# Altium PCB Holtek_Discovery_BS6xfxxx_TEST1.PcbDoc
Units mil, origin at the board's own origin, x right, y up, seen from the top; angles counter-clockwise.
Board outline 2755.91 x 3545 mil, 2 copper layers (Top Layer, Bottom Layer); 76 components, 96 nets, 307 pads, 108 vias.
Unrouted connection lines stored in the file: 4.
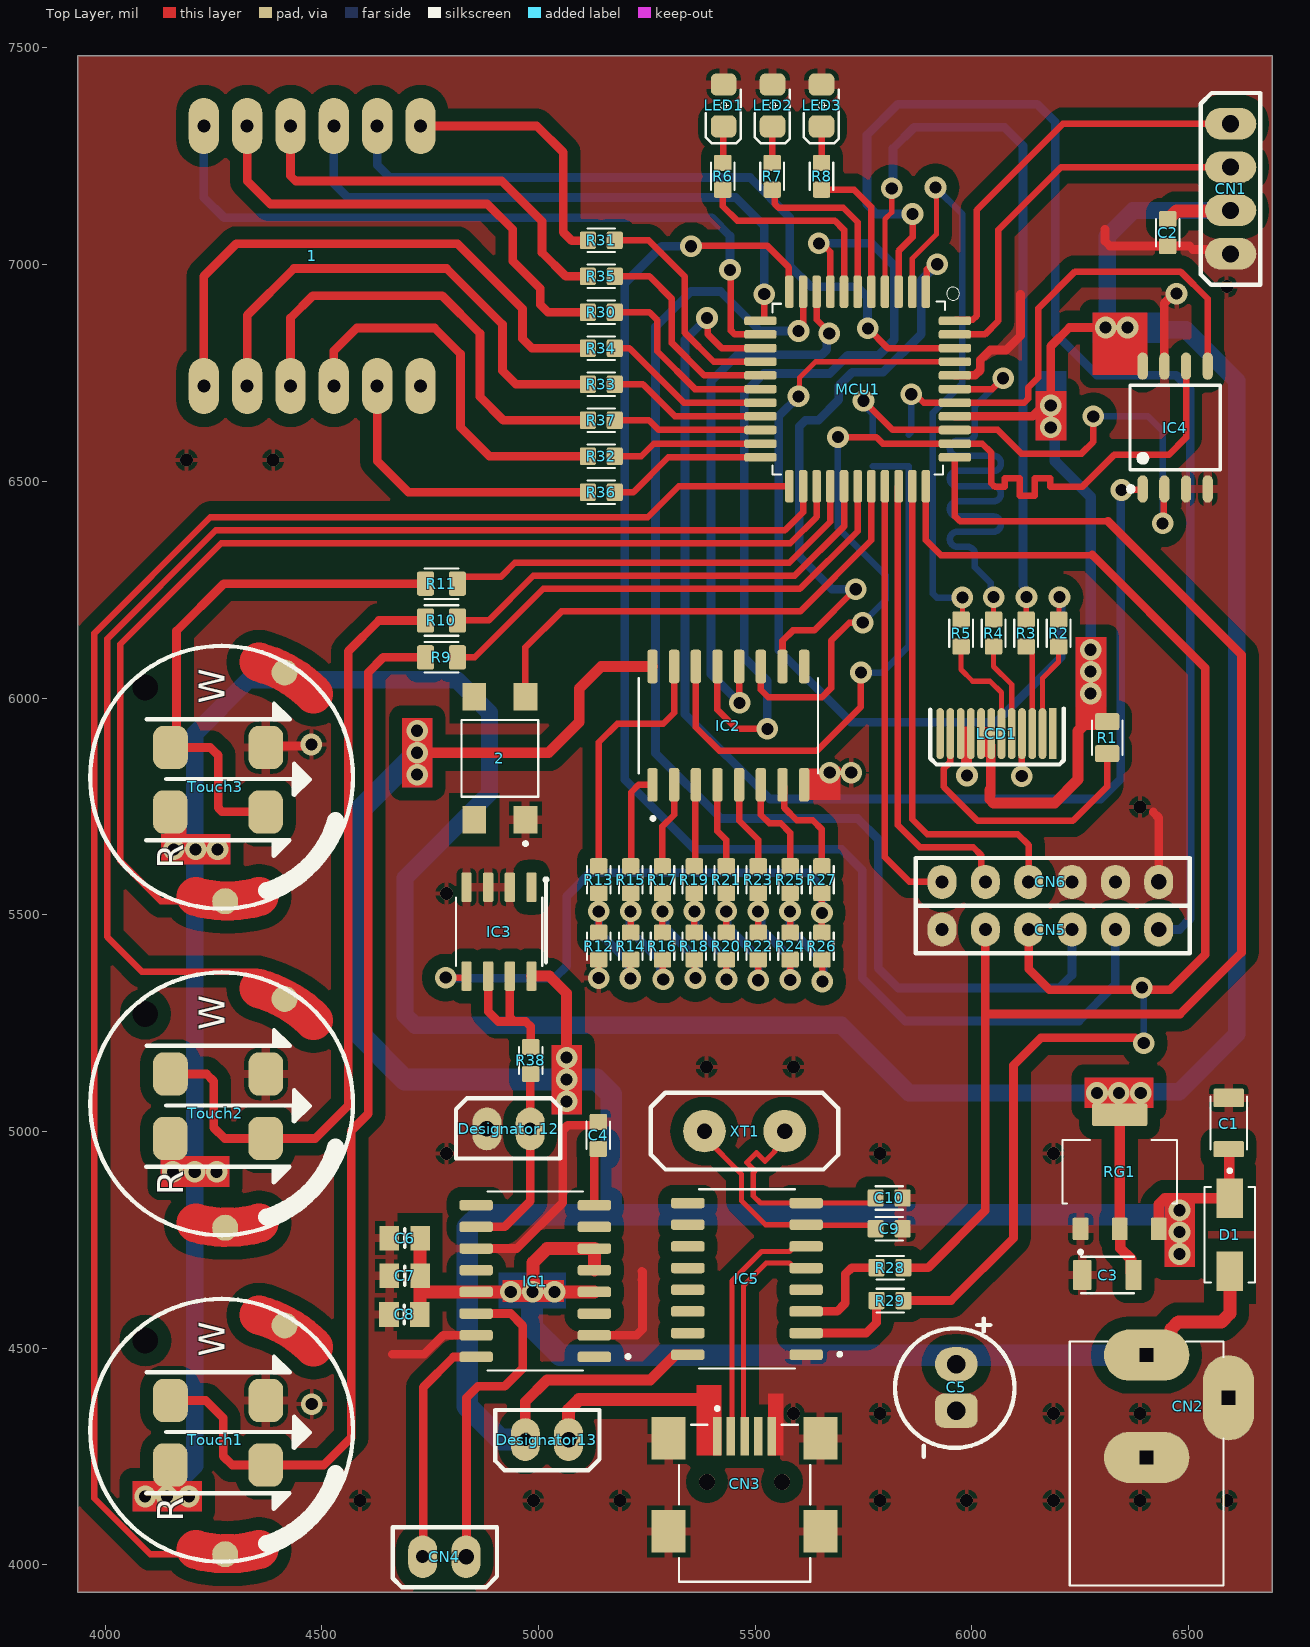
[diagram p0: Top Layer view]
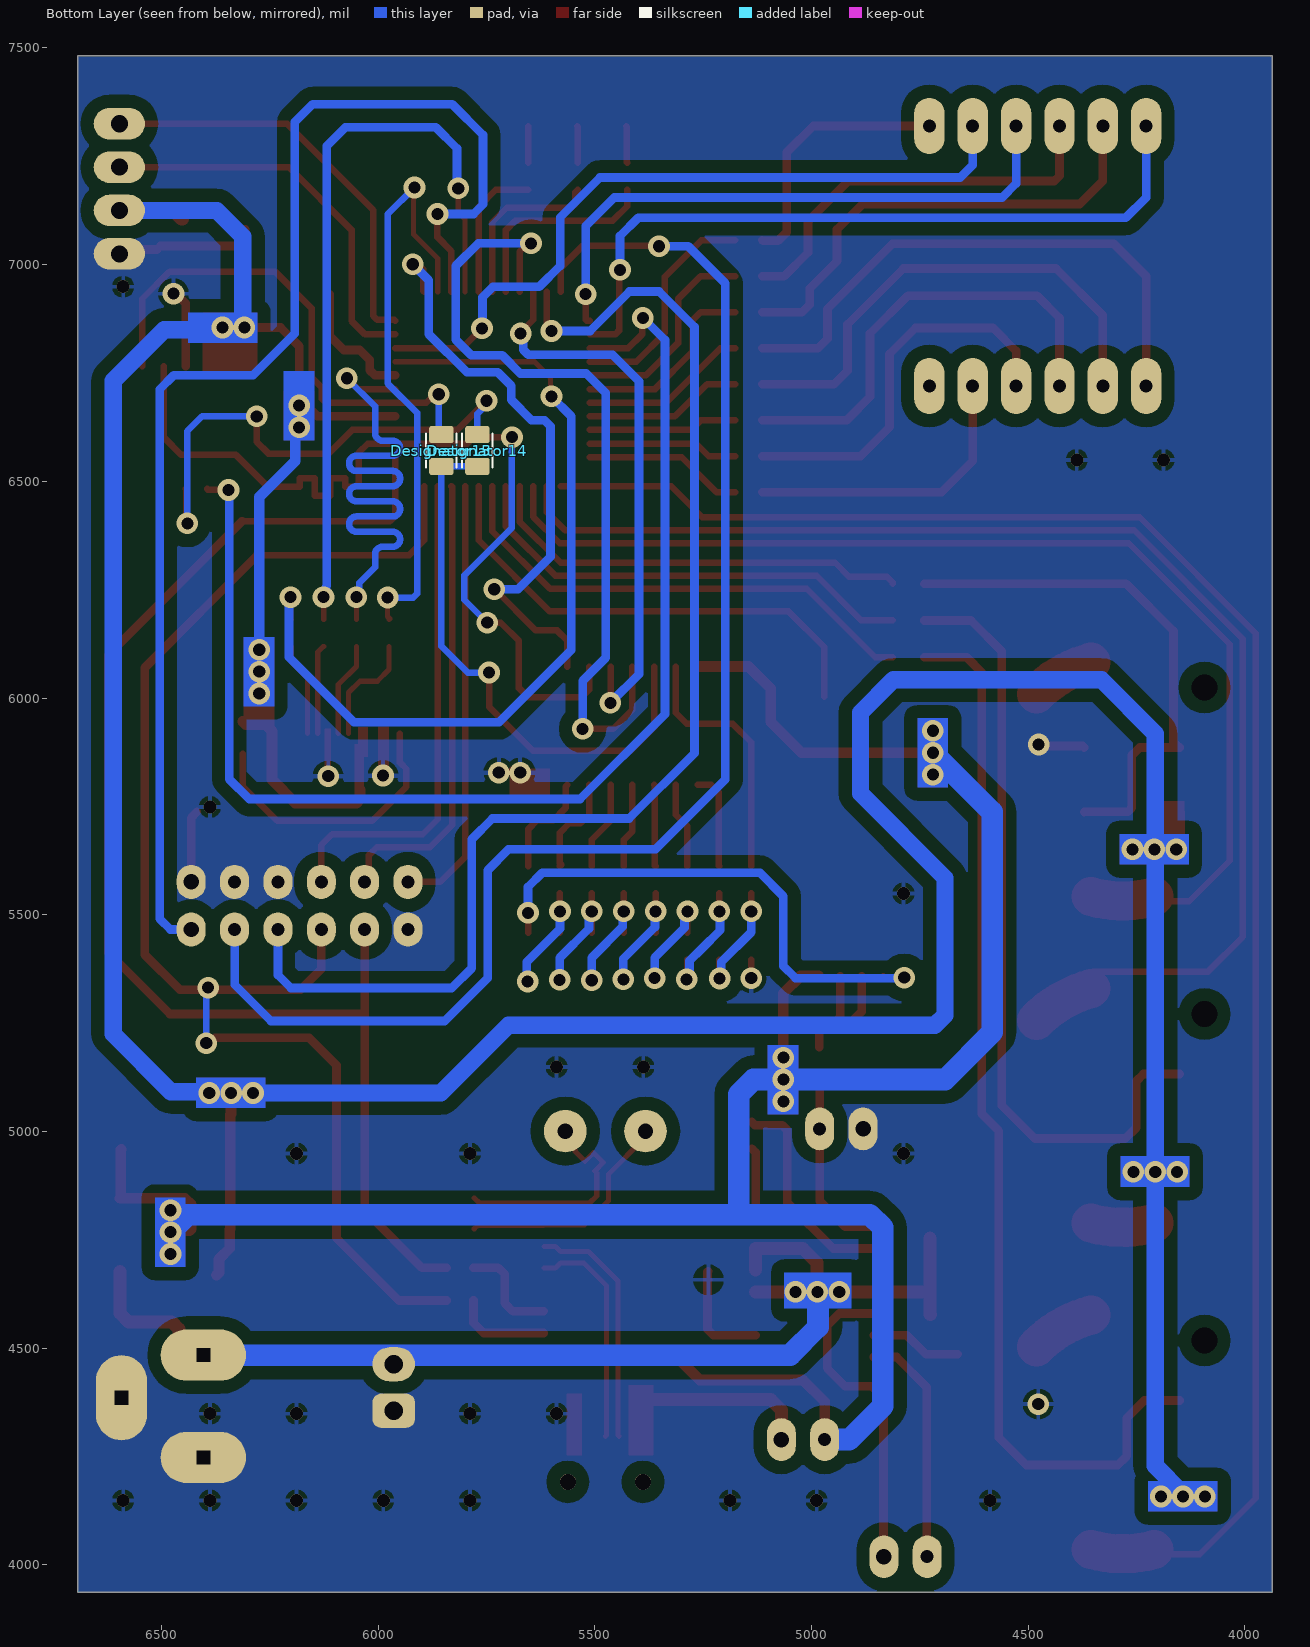
[diagram p1: Bottom Layer view, seen from below]
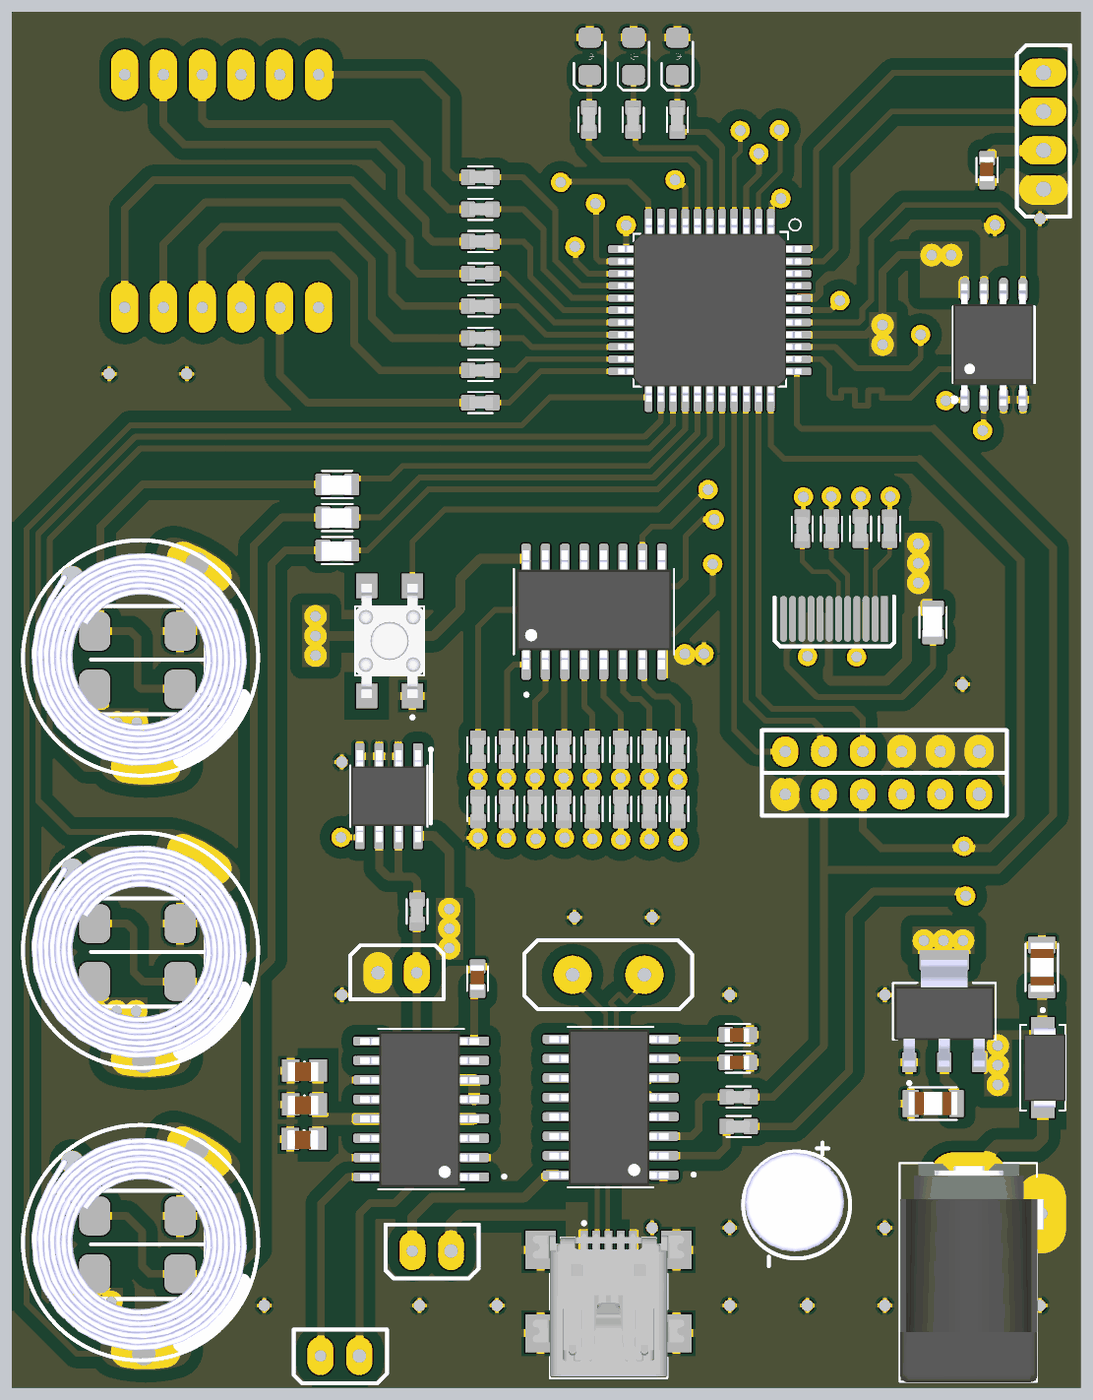
[diagram p2: 3D render of the assembled board from above, using the file's embedded part models]

## Layer stack, top to bottom
Top Solder: solder mask 0.4, Solder Resist, Dk 3.5
Top Layer: signal copper 1.4
Dielectric 1: dielectric 12.6, FR-4, Dk 4.8
Bottom Layer: signal copper 1.4
Bottom Solder: solder mask 0.4, Solder Resist, Dk 3.5

## Board outline
3937,3937 3937,7482 6692.91,7482 6692.91,3937

## Design rules (kind name [scope] priority, off if disabled: settings)
Clearance POLY [InPolygon] p1: gap=30 ignorepadtopadclearanceinfootprint=FALSE
Clearance COMPONENT [InComponent('MCU1')+InComponent('LCD1')+InComponent('CN3')+InComponent('Touch1')  +InComponent('Touch2')+InComponent('Touch3')] p2: gap=0 ignorepadtopadclearanceinfootprint=FALSE
Clearance SPI-LCD [InNetClass('LCD')+InNetClass('SPI')] p3: gap=10 ignorepadtopadclearanceinfootprint=FALSE
Clearance POWER+ [InNetClass('POWER')] p4: gap=15 ignorepadtopadclearanceinfootprint=FALSE
Clearance NORMAL [All] p5: gap=15 ignorepadtopadclearanceinfootprint=FALSE
ComponentClearance a [InComponent('CN5')+InComponent('CN7')] p1: gap=0 collisioncheckmode=3 verticalgap=0 showdistances=FALSE
ComponentClearance [All] p2: gap=10 collisioncheckmode=3 verticalgap=10 showdistances=FALSE
DiffPairsRouting [InDifferentialPair('USB')] p1: maxlimit=50 minlimit=10 mostfreqgap=15 toplayer_minwidth=10 toplayer_maxwidth=50 toplayer_prefwidth=15 bottomlayer_minwidth=10 bottomlayer_maxwidth=50 bottomlayer_prefwidth=15 maxuncoupledlength=500
MatchedLengths [InNetClass('LCD')+InNetClass('SPI')+InNetClass('XT')] p1: tolerance=78.74 checknetsindiffpair=FALSE checkdiffpairvsdiffpair=TRUE checkxsignals=TRUE checkothers=TRUE
PlaneConnect [All] p1: planeconnectstyle=Direct reliefexpansion=20 reliefentries=4 reliefconductorwidth=10 reliefairgap=10
PolygonConnect all [All] p1: thpad.connectstyle=Direct thpad.reliefconductorwidth=30 thpad.reliefentries=4 thpad.polygonreliefangle="45 Angle" thpad.airgapwidth=30 smdpad.connectstyle=Relief smdpad.reliefconductorwidth=20 smdpad.reliefentries=4 smdpad.polygonreliefangle="90 Angle" smdpad.airgapwidth=10 via.connectstyle=Relief via.reliefconductorwidth=10 via.reliefentries=4 via.polygonreliefangle="90 Angle" via.airgapwidth=10
RoutingVias [All] p1: holewidth=28 width=50 viastyle="Through Hole" minholewidth=28 minwidth=50 maxholewidth=28 maxwidth=50
SolderMaskExpansion [All] p1: expansion=4 istentingtop=FALSE
Width LCD-SPI [InNetClass('LCD')+InNetClass('SPI')] p1: maxlimit=15 minlimit=10 preferedwidth=15 minimp=50.000000 maximp=50.000000 favimp=50.000000
Width POWER [InNetClass('POWER')] p2: maxlimit=50 minlimit=20 preferedwidth=30 bottomlayer_minwidth=25 minimp=50.000000 maximp=50.000000 favimp=50.000000
Width ELSE [All] p3: maxlimit=100 minlimit=10 preferedwidth=20 minimp=50.000000 maximp=50.000000 favimp=50.000000
27 further rules are at their usual default settings.

## Classes and differential pairs
net class XT: NetC9_2 NetC10_2
net class SPI: MISO MOSI SPI_CLK
net class POWER: +3.3 +5 NetC2_2
net class LCD: LCD_SCL LCD_SDA NetLCD1_2 NetLCD1_3 NetLCD1_5 NetLCD1_6
net class ADC: AN4 AN5 AN6
component class U_Connectors: C1 C2 CN2 CN3 CN4 CN5 D1 LCD1 R1 R2 R3 R4 R5 RG1
net class Analog: +5_JAC DAC_OUT GND IN_L NetC4_1 NetIC1_9 NetIC2_1 NetIC2_2 NetIC2_3 NetIC2_4 NetIC2_5 NetIC2_6 NetIC2_7 NetIC2_15 NetIC3_1 NetIC3_5 NetR12_1 NetR14_1 NetR16_1 NetR18_1 NetR20_1 NetR22_1 NetR24_1 OUT_L+ OUT_L- OUT_R+ OUT_R-
component class U_USB_to_Serial_Adapter: C9 C10 IC5 R28 R29 XT1
component class U_Spi_Flash: IC4
component class U_Microcontroller: C3 CN1 MCU1
component class U_Led-7Segment-Switch: 1 2 LED1 LED2 LED3 R6 R7 R8 R30 R31 R32 R33 R34 R35 R36 R37
component class U_DAC: IC2 IC3 R12 R13 R14 R15 R16 R17 R18 R19 R20 R21 R22 R23 R24 R25 R26 R27
component class U_Capacitive_touch: R9 R10 R11 Touch1 Touch2 Touch3
component class U_Amplifier-Speaker: C4 C5 C6 C7 C8 IC1
differential pair NewDifferentialPair1: +NetC9_2 -NetC10_2
differential pair USB: +USB_P -USB_N

## Components (designator, comment, footprint, x,y, rotation, side; value= is the part's Value field where it differs from the comment)
1 "7SEG-3DIG" 7seg-3d 4228,6720 r0 top
2 "micro_sw" micro_switch_smd 4911,5861 r90 top
C1 "cap" CAP-1206 6587,5019 r270 top
C2 "cap" CAP-0603 6451,7078 r90 top
C3 "100nF" CAP-1206 6313.27,4663.51 r0 top
C4 "100nF" CAP-0603 5137.33,4995.16 r90 top
C5 "470uF" cap/330u/16v 5964,4355.93 r90 top
C6 "1uF" CAP-0805 4655.01,4754.85 r0 top
C7 "1uF" CAP-0805 4655,4668 r0 top
C8 "1uF" CAP-0805 4654.15,4578.85 r0 top
C9 "22pF" CAP-0603 5805,4775 r180 top
C10 "22pF" CAP-0603 5805,4846 r180 top
CN1 "ICP" CONECTOR/XH/4PIN 6597,7025 r90 top
CN2 "DC005" dc005 6402.84,4386.35 r90 top
CN3 "mini_usb" usb_mini_smd 5475.5,4191.69 r0 top
CN4 "\" CONECTOR/XH/2PIN 4831.69,4020.75 r180 top
CN5 "TIM-INT0" pin_header_6pin 6430.99,5466.01 r180 top
CN6 "TIM-INT0" pin_header_6pin 6430.99,5576.01 r180 top (schematic designator CN5)
D1 "M7" DIOD/1N4007/SMD 6595,4846.75 r270 top
Designator12 "Comment" CONECTOR/XH/2PIN 4882.31,5004.25 r0 top
Designator13 "Comment" CONECTOR/XH/2PIN 5068.24,4291.07 r180 top
Designator14 "Comment" RES/0805 5807.75,6612.47 r270 bottom
Designator15 "Comment" RES/0805 5890.75,6612.47 r270 bottom
IC1 "PAM8403" SOP16 4992.62,4655 r180 top
IC2 "74hc595" SOP16 5438,5936.38 r90 top
IC3 "LM358" SOP-8 4904,5446 r270 top
IC4 "W25QXX" SOIC-8PIN-280MIL 6469,6624 r90 top
IC5 "CH340G" SOP16 5481,4660 r180 top
LCD1 "LCD_TFT_NOKIA1616" lcd1616-flat 6186.45,5918.86 r90 top
LED1 "red" LED/0805 5427.01,7318.99 r90 top
LED2 "red" LED/0805 5540.02,7318.99 r90 top
LED3 "red" LED/0805 5653.02,7318.99 r90 top
MCU1 "bs66f360" bs66f360 5541.41,6908.02 r270 top locked
R1 "10R" RES/0805 6275.25,5950.09 r270 top
R2 "1K" RES/0603 6200,6154 r90 top
R3 "1K" RES/0603 6125,6154 r90 top
R4 "1K" RES/0603 6050,6154 r90 top
R5 "1K" RES/0603 5975,6154 r90 top
R6 "330R" RES/0603 5425.01,7200 r270 top
R7 "330R" RES/0603 5539.01,7200 r270 top
R8 "330R" RES/0603 5653.01,7200 r270 top
R9 "100R" RES/0805 4734.91,6057.25 r0 top
R10 "100R" RES/0805 4734.91,6142.25 r0 top
R11 "100R" RES/0805 4734.91,6227.25 r0 top
R12 "10K-1%" RES/0603 5139,5424 r270 top
R13 "10K-1%" RES/0603 5139,5584.8 r90 top
R14 "10K-1%" RES/0603 5212.57,5424 r270 top
R15 "10K-1%" RES/0603 5212.57,5584.8 r90 top
R16 "10K-1%" RES/0603 5286.14,5424 r270 top
R17 "10K-1%" RES/0603 5286.14,5584.8 r90 top
R18 "10K-1%" RES/0603 5359.71,5424 r270 top
R19 "10K-1%" RES/0603 5359.71,5584.8 r90 top
R20 "10K-1%" RES/0603 5433.29,5424 r270 top
R21 "10K-1%" RES/0603 5433.29,5584.8 r90 top
R22 "10K-1%" RES/0603 5506.86,5424 r270 top
R23 "10K-1%" RES/0603 5506.86,5584.8 r90 top
R24 "10K-1%" RES/0603 5580.43,5424 r270 top
R25 "10K-1%" RES/0603 5580.43,5584.8 r90 top
R26 "10K-1%" RES/0603 5654,5424 r270 top
R27 "10K-1%" RES/0603 5654,5584.8 r90 top
R28 "470R" RES/0603 5815,4686 r0 top
R29 "470R" RES/0603 5815,4610 r0 top
R30 "100R" RES/0603 5141,6890 r180 top
R31 "100R" RES/0603 5141,7056 r180 top
R32 "100R" RES/0603 5141,6558 r180 top
R33 "100R" RES/0603 5141,6724 r180 top
R34 "100R" RES/0603 5141,6807 r180 top
R35 "100R" RES/0603 5141,6973 r180 top
R36 "100R" RES/0603 5141,6475 r180 top
R37 "100R" RES/0603 5141,6641 r180 top
R38 "10K-1%" RES/0603 4982,5160 r270 top (schematic designator R12)
RG1 "AMS1117" AMS1117 6341,4897 r90 top
Touch1 "touch-fanar-2led" fanar-touch-2led#1 4249.28,4311.23 r90 top
Touch2 "touch-fanar-2led" fanar-touch-2led#2 4249.28,5064.46 r90 top
Touch3 "touch-fanar-2led" fanar-touch-2led#3 4249.28,5817.68 r90 top
XT1 "12MH" XTL16MH 5568,5001 r180 top

## Footprints (in the part's own frame and the unit in brackets; to place one, negate y for a bottom-side part, rotate by r counter-clockwise, add the part's x,y. Pads: shape width x height; smd on the part's side, far side on the other; paste and mask are expansions set on the pad)
7seg-3d [mil]
  oval 70x130 hole 30: A(100,600) B(500,600) C(300,0) D(100,0) DIS(500,0) DOT(200,0) E(-0.01,-0.01) F(200,600) G(400,0) M1(0,600) M2(300,600) M3(400,600)
AMS1117 [mm]
  rrect15% 1.31x0.93 smd: 1(-3.091,2.29) 2(-3.091,0) 3(-3.091,-2.29)
  rrect15% 1.31x3.24 smd: 4(3.599,0)
  silkscreen extent -4.55,-3.36 2.11,3.36, body extent -3.37,-3.25 3.63,3.25, height 1.73
bs66f360 [mm]
  rrect50% 1.9x0.5 smd: 1(-0.747,8.953) 2(-0.747,8.153) 3(-0.747,7.353) 4(-0.747,6.553) 5(-0.747,5.753) 6(-0.747,4.953) 7(-0.747,4.153) 8(-0.747,3.353) 9(-0.747,2.553) 10(-0.747,1.753) 11(-0.747,0.953) 23(10.653,0.953) 24(10.653,1.753) 25(10.653,2.553) 26(10.653,3.353) 27(10.653,4.153) 28(10.653,4.953) 29(10.653,5.753) 30(10.653,6.553) 31(10.653,7.353) 32(10.653,8.153) 33(10.653,8.953)
  rrect50% 0.5x1.9 smd: 12(0.953,-0.747) 13(1.753,-0.747) 14(2.553,-0.747) 15(3.353,-0.747) 16(4.153,-0.747) 17(4.953,-0.747) 18(5.753,-0.747) 19(6.553,-0.747) 20(7.353,-0.747) 21(8.153,-0.747) 22(8.953,-0.747) 34(8.953,10.653) 35(8.153,10.653) 36(7.353,10.653) 37(6.553,10.653) 38(5.753,10.653) 39(4.953,10.653) 40(4.153,10.653) 41(3.353,10.653) 42(2.553,10.653) 43(1.753,10.653) 44(0.953,10.653)
  silkscreen extent -1.02,-0.05 9.95,10.92, body extent -1.05,-1.04 10.95,10.96, height 1.6
CAP-0603 [mm]
  rrect20% 0.94x1.02 smd: 1(-0.893,-0.017) 2(0.687,-0.017)
  silkscreen extent -0.9,-0.71 0.7,0.67, body extent -0.84,-0.44 0.76,0.46, height 0.77
CAP-0805 [mm]
  rect 1.15x1.45 smd: 1(0.025,-0.022) 2(1.825,-0.022)
  silkscreen extent 0.93,-0.57 0.93,0.53, body extent -0.17,-0.71 1.84,0.54, height 0.94
CAP-1206 [mm]
  rrect14% 1.09x1.77 smd: 1(-1.488,0.139)
  rrect14% 0.94x1.77 smd: 2(1.517,0.139)
  silkscreen extent -1.57,-0.93 1.53,1.2, body extent -1.63,-0.6 1.57,0.9, height 1.6
cap/330u/16v [mm]
  oval 2x2.5 hole 1.1: +(2.72,0)
  rrect50% 2x2.5 hole 1.1: -(0,0)
  silkscreen extent -2.7,-3.41 5.4,3.59, body extent -1.74,-3.02 4.76,3.48, height 11
CONECTOR/XH/2PIN [mm]
  oval 1.7x2.5 hole 0.9: 1(-0.033,0.044)
  oval 1.7x2.5 hole 0.762: 2(2.507,0.044)
  silkscreen extent -1.84,-1.69 4.26,1.84
CONECTOR/XH/4PIN [mm]
  oval 1.85x3 hole 1: 1(0,0) 2(2.54,0) 3(5.08,0) 4(7.62,0)
  silkscreen extent -1.81,-1.73 9.43,1.75
dc005 [mm]
  oval 5x3 hole 0.8 square: 2(-0.014,-4.804)
  oval 3x5 hole 0.8 square: 3(-3.514,-0.004) 4(2.486,-0.004)
  silkscreen extent -11.01,-4.5 3.29,4.5, body extent -11.06,-4.94 3.24,4.46, height 11
DIOD/1N4007/SMD [mm]
  rect 2.33x1.56 smd: A(4.299,0) K(0.019,0)
  silkscreen extent -1.7,-1.48 4.96,1.48, body extent -0.44,-1.24 4.76,1.49, height 2.6
fanar-touch-2led#1 [mil]
  oct 0x0 hole 59.06: 5(206.71,156.04)
  rrect60% 100x80 smd: AR(-80.55,98.79) AW(68.32,98.28) KR(-80.55,-121.21) KW(68.32,-121.72)
  round 60 smd: T(-286.39,-27.99) T(241.59,-165.09)
  Top Layer lines w90: -275.86,39.27 ccw(c-5.4,-33.2) -275.75,-106.1 ; 265.05,-105.67 cw(c-5.4,-33.2) 191.96,-231.81
  silkscreen extent -304,-323 303,283, body extent -384,-398 381,369, height 634
fanar-touch-2led#2 [mil]
  oct 0x0 hole 59.06: 5(206.71,156.04)
  rrect60% 100x80 smd: AR(-80.55,98.79) AW(68.32,98.28) KR(-80.55,-121.21) KW(68.32,-121.72)
  round 60 smd: T(-286.39,-27.99)
  round 60 smd paste-60: T(241.59,-165.09)
  Top Layer lines w90: -275.86,39.27 ccw(c-5.4,-33.2) -275.75,-106.1 ; 265.05,-105.67 cw(c-5.4,-33.2) 241.59,-165.09 cw(c-5.4,-33.2) 191.96,-231.81
  silkscreen extent -304,-323 303,283, body extent -384,-398 381,369, height 634
fanar-touch-2led#3 [mil]
  oct 0x0 hole 59.06: 5(206.71,156.04)
  rrect60% 100x80 smd: AR(-80.55,98.79) AW(68.32,98.28) KR(-80.55,-121.21) KW(68.32,-121.72)
  round 60 smd paste-60: T(-286.39,-27.99)
  round 60 smd: T(241.59,-165.09)
  Top Layer lines w90: -275.86,39.27 ccw(c-5.4,-33.2) -275.75,-106.1 ; 265.05,-105.67 cw(c-5.4,-33.2) 191.96,-231.81
  silkscreen extent -304,-323 303,283, body extent -384,-398 381,369, height 634
lcd1616-flat [mm]
  rect 3x0.45 smd paste+0 mask+0: 1(-0.022,-0.001)
  oval 3x0.45 smd paste+0 mask+0: 2(-0.022,0.599) 3(-0.022,1.199) 4(-0.022,1.799) 5(-0.022,2.399) 6(-0.022,2.999) 7(-0.022,3.599) 8(-0.022,4.199) 9(-0.022,4.799) 10(-0.022,5.399) 11(-0.022,5.999) 12(-0.022,6.599)
  silkscreen extent -1.83,-0.65 1.45,7.18
LED/0805 [mm]
  rrect50% 1.3x1.5 smd: A(2.45,0) K(0,0)
  silkscreen extent -0.99,-1.02 2.16,1.03
micro_switch_smd [mm]
  rect 1.6x1.4 smd: 1(-3.6,-1.5) 2(3.6,-1.5) 3(-3.6,1.5) 4(3.6,1.5)
  silkscreen extent -5.1,-2.25 2.25,2.25, body extent -3.75,-2.25 3.75,2.25, height 3.7
pin_header_6pin [mm]
  oval 1.7x2 hole 0.9: 1(0,0)
  oval 1.7x2 hole 0.762: 2(2.54,0) 3(5.08,0) 4(7.62,0) 5(10.16,0) 6(12.7,0)
  silkscreen extent -1.81,-1.4 14.23,1.4
RES/0603 [mm]
  rrect20% 0.94x1.02 smd: 1(-0.889,0) 2(0.691,0)
  silkscreen extent -0.9,-0.69 0.7,0.69, body extent -0.93,-0.41 0.67,0.39, height 0.43
RES/0805 [mm]
  rrect25% 1x1.42 smd: 1(0.113,0.933) 2(1.983,0.933)
  silkscreen extent 0.05,0.04 2.05,1.82, body extent 0,0.28 2,1.53, height 0.6
SOIC-8PIN-280MIL [mm]
  oval 1.6x0.6 smd: 1(-3.596,1.905) 2(-3.596,0.635) 3(-3.596,-0.635) 4(-3.596,-1.905) 5(3.604,-1.905) 6(3.604,-0.635) 7(3.604,0.635) 8(3.604,1.905)
  silkscreen extent -3.82,-2.65 2.48,2.82, body extent -3.99,-2.59 3.99,2.65, height 2.16
SOP16 [mm]
  rrect50% 1.97x0.61 smd: 1(-3.464,4.445) 2(-3.464,3.175) 3(-3.464,1.905) 4(-3.464,0.635) 5(-3.464,-0.635) 6(-3.464,-1.906) 7(-3.464,-3.175) 8(-3.464,-4.445) 9(3.466,-4.445) 10(3.466,-3.175) 11(3.466,-1.905) 12(3.466,-0.635) 13(3.466,0.635) 14(3.466,1.905) 15(3.466,3.175) 16(3.466,4.445)
  silkscreen extent -5.53,-5.25 2.8,5.25, body extent -3.79,-5.09 4.01,5.11, height 2
SOP-8 [mm]
  rrect25% 1.71x0.61 smd: 1(-2.986,2.032) 2(-2.986,0.762) 3(-2.986,-0.508) 4(-2.986,-1.778) 5(2.224,-1.778) 6(2.224,-0.508) 7(2.224,0.762) 8(2.224,2.032)
  silkscreen extent -3.53,-2.4 1.62,2.98, body extent -3.38,-2.32 2.62,2.58, height 1.75
usb_mini_smd [mm]
  rect 0.5x2.25 smd: 1(-1.6,2.675) 2(-0.8,2.675) 3(0,2.675) 4(0.8,2.675) 5(1.6,2.675)
  rect 2x2.5 smd: S1(-4.45,2.55) S2(4.45,2.55) S3(-4.45,-2.9) S4(4.45,-2.9)
  round 0.95 hole 0.95 unplated: ""(-2.2,0) ""(2.2,0)
  silkscreen extent -3.85,-5.85 3.85,4.4, body extent -4.95,-5.72 4.95,3.61, height 3.95
XTL16MH [mm]
  round 2.5 hole 0.9: 1(0,0) 2(4.7,0)
  silkscreen extent -3.13,-2.25 7.85,2.25

## Part data
C1 C2 C3 C4 C6 C7 C8 C9 C10: library part cap_smd
C5: library part cap-electrolit
CN1: library part CONECTOR/XH/4PIN
CN2: library part JAC_ADAPTOR
CN3: library part usb_mini
CN4: library part CONECTOR/XH/2PIN
CN5 CN6: library part PIN_HEADER6
D1: library part DIOD/RECTIFIERS
IC1: "STEREO AUDIO AMPLIFIER"
IC4: library part w25qxx
IC5: library part ch340g
LCD1: library part lcd_nokia1616
LED1 LED2 LED3: library part LED-1COLER
R1 R2 R3 R4 R5 R6 R7 R8 R9 R10 R11 R12 R13 R14 R15 R16 R17 R18 R19 R20 R21 R22 R23 R24 R25 R26 R27 R28 R29 R30 R31 R32 R33 R34 R35 R36 R37 R38: library part RES/SMD
XT1: library part XTL16

## Via types
v1: diameter 50, hole 28, Top Layer to Bottom Layer, 86 vias
v2: diameter 30, hole 30, Top Layer to Bottom Layer, 22 vias

## Nets (pads, with @x,y where several pads share a name; then routed paths per layer and width w, separated by ;. In a path a pad name is that pad's centre, name@x,y a point inside that pad or via, vN(x,y) a via of type N, cw(c..) or ccw(c..) an arc to the next point about the centre after c; other vN are vias at no path point)
7SEG1_A: MCU1.17 R30.1 | length 451.5
  Top Layer w15: R30.1 5256,6890 5274,6872 5274,6800 5360.98,6713.02 MCU1.17
7SEG1_B: MCU1.15 R31.1 | length 527.9
  Top Layer w15: R31.1 5254,7056 5338,6972 5338,6842.43 5404.42,6776.01 MCU1.15
7SEG1_C: MCU1.21 R32.1 | length 348
  Top Layer w15: R32.1 5237,6558 5266.03,6587.03 MCU1.21
7SEG1_D: MCU1.19 R33.1 | length 366.6
  Top Layer w15: R33.1 5241,6724 5314.98,6650.02 MCU1.19
7SEG1_DOT: MCU1.20 R37.1 | length 345.3
  Top Layer w15: R37.1 5255,6641 5277.47,6618.53 MCU1.20
7SEG1_E: MCU1.18 R34.1 | length 388
  Top Layer w15: R34.1 5210,6807 5335.48,6681.52 MCU1.18
7SEG1_F: MCU1.16 R35.1 | length 490.4
  Top Layer w15: R35.1 5256,6973 5308,6921 5308,6819 5382.49,6744.51 MCU1.16
7SEG1_G: MCU1.22 R36.1 | length 369.4
  Top Layer w15: R36.1 5219,6475 5299.54,6555.54 MCU1.22
7SEG1_M1: 1.M1 MCU1.13 | length 1706.5
  Top Layer w15: v1(5442,6988) 5444,6986 5444,6847.79 5452.79,6839 MCU1.13
  Bottom Layer w20: 1.M1 4228,7155 4275,7108 5400,7108 5442,7066 v1(5442,6988)
7SEG1_M2: 1.M2 MCU1.12 | length 1392.7
  Top Layer w15: MCU1.12 5518.66,6870.5 5521,6872.84 v1(5521,6932)
  Bottom Layer w20: 1.M2 4528,7187 4560,7155 5455,7155 5521,7089 v1(5521,6932)
7SEG1_M3: 1.M3 MCU1.42 | length 1705
  Top Layer w15: v1(5760,6853) 5805.5,6807.5 MCU1.42
  Bottom Layer w20: 1.M3 4628,7230 4657,7201 5488,7201 5580,7109 5580,6997 5628,6949 5735,6949 5759,6925 5759,6854 v1(5760,6853)
+3.3: C2.2 C3.2 CN1.2 IC4.8 LCD1.7 LCD1.8 MCU1.37 R1.1 RG1.2 RG1.4 Touch1.AR Touch2.AR Touch3.AR | length 10168.7
  Top Layer w20: MCU1.37 6140.02,6650.02 v1@6182,6692 ; v1(6182,6675) v1@6182,6692 ; v1(6308.5,6855) 6225,6855 6182,6812 v1@6182,6692
  Top Layer w25: Touch3.AR 4150.25,5736.88 4150.25,5660.25 4159.49,5651 v1(4209,5651) ; 6041,5788 6041,5766.64 6049.64,5758 6191,5758 6245,5812 6245,5923.79 6259.64,5938.44 6304.81,5938.44 R1.1 6303.73,5945.62 6262,5987.35 v1@6262,6026 ; v1(6339,5089) 6339,5040.69 RG1.4 RG1.2 6342.11,4774.2 6342.11,4730.89 6367,4706 6367,4675 C3.2
  Top Layer w30: C2.2 6453.24,7105.05 6472.2,7124 6596,7124 CN1.2
  Bottom Layer w25: 6191,6649 6191,6547 6274,6464 v1(6274,6111.5) v1(6274,6061)
  Bottom Layer w40: v1(4143,4158) 4143,4164.76 4207,4228.76 v1(4207,4907) 4207,5918 4331,6042 4811,6042 4887,5966 4887,5780 4692,5585 4692,5268.43 4715.43,5245 5699,5245 5855,5089 v1(6288.5,5089) v1(6339,5089) 6342,5092 6478,5092 6611,5225 6611,6732 6493,6850 6317,6850 6312,6855 6312,7065 6372,7125 CN1.2
  other v1: 4092.5,4158 4193.5,4158 4156.5,4907 4257.5,4907 6389.5,5089 4158.5,5651 4259.5,5651 6274,6010.5 6182,6624.5 6359,6855
+5: C1.2 D1.K Designator13.2 IC2.16 IC3.8 IC5.16 RG1.3 | length 5738.7
  Top Layer w25: v1(4720,5874) 5023,5874 5094,5945 5094,6021.83 5145,6072.83 IC2.16 ; Designator13.2 4969.55,4376.55 5020,4427 5258,4427 5316,4485 IC5.16 ; IC3.8 5025.56,5358.44 5065,5319 v1(5065,5120) ; v1(6479,4768) 6475.35,4771.65 6434.81,4771.65 RG1.3 6431.16,4831.36 6445.8,4846 D1.K 6593.74,4847.26 6593.74,4958.01 C1.2
  Bottom Layer w50: v1(4720,5874) 4583,5737 4583,5229 4692,5120 5134,5120 5168,5086 5168,4808 ; Designator13.2 4912.68,4289.32 4836,4366 4836,4778.71 4865.29,4808 6439,4808 v1(6479,4768)
  other v1: 6479,4717.5 6479,4818.5 5065,5069.5 5065,5170.5 4720,5823.5 4720,5924.5
+5_JAC: C5.+ C6.2 C7.2 C8.2 CN2.4 D1.A IC1.4 IC1.5 IC1.6 IC1.13 | length 2719.7
  Top Layer w30: C8.2 4726.43,4578.43 4726.43,4636 ; C6.2 4726.43,4753.57 4726.43,4636 ; IC1.4 4991.65,4630 v1@4987.83,4633.83 ; IC1.5 IC1.6 5020.02,4730.02 4987.83,4697.83 v1@4987.83,4633.83 ; CN2.4 6418.53,4484.22 6459.23,4524.92 6459.23,4543.92 6476.31,4561 6576,4561 6595,4580 D1.A ; 4726.43,4636 4732.43,4630 IC1.13 4984,4630 v1@4987.83,4633.83
  Bottom Layer w50: v1@4984,4630 4984,4621 4985,4620 4985,4549 5049.78,4484.22 CN2.4
  other v1: 4936,4630 4986.5,4630 5037,4630
+5usb: CN3.1 Designator13.1 | length 441.2
  Top Layer w30: Designator13.1 5069.55,4357.55 5093.77,4381.77 5379.5,4381.77 5393.25,4368.02 5393.25,4334.5
AN4: CN6.4 MCU1.32 | length 1146.3
  Top Layer w15: MCU1.32 5862.39,5720.61 5897,5686 6106,5686 6131,5661 CN6.4
AN5: CN6.5 MCU1.31 | length 1068.8
  Top Layer w15: MCU1.31 5829.4,6487.11 5829.4,5706.6 5880,5656 6003,5656 6021.12,5637.88 6021.12,5585.89 CN6.5
AN6: CN6.6 MCU1.30 | length 1011
  Top Layer w15: MCU1.30 5799.4,5632.6 5855.99,5576.01 CN6.6
CH_RXD: IC5.3 R28.1 | length 243.9
  Top Layer w20: IC5.3 5689,4585 5708,4604 5708,4671.36 5722.64,4686 R28.1
CH_TXD: IC5.2 R29.1 | length 223.6
  Top Layer w20: IC5.2 5756,4535 5780,4559 R29.1
CS-SpI_Flash: IC4.1 MCU1.14 | length 2931.1
  Top Layer w15: v1(5389,6877) 5391,6875 5391,6839 5422.5,6807.5 MCU1.14 ; v1(6345,6480) 6346.21,6481.21 6392.79,6481.21 IC4.1
  Bottom Layer w20: v1(5389,6877) 5338,6826 5338,5963 5534,5767 6297,5767 6343,5813 6343,6478 v1(6345,6480)
DAC_OUT: Designator12.2 IC1.10 IC3.6 IC3.7 R38.1 R38.2 | length 793.2
  Top Layer w20: IC1.10 4922,4780 4981,4839 Designator12.2 4981,5131.8 R38.2 ; IC3.6 4884,5277 4907,5254 4944,5254 ; IC3.7 4934,5264 4944,5254 ; R38.1 4982,5242.28 4970.28,5254 4944,5254
GND: 2.1 C1.1 C2.1 C3.1 C4.2 C5.- C6.1 C7.1 C8.1 C9.1 C10.1 CN1.1 CN2.2 CN2.3 CN3.5 CN3.S1 CN3.S2 CN3.S3 CN3.S4 CN5.6 CN6.1 CN6.2 CN6.3 Designator12.1 IC1.2 IC1.11 IC1.15 IC2.8 IC3.2 IC3.3 IC3.4 IC4.3 IC4.4 IC4.7 IC5.1 LCD1.4 LCD1.9 LCD1.10 LED1.A LED2.A LED3.A MCU1.40 R12.2 RG1.1 Touch1.KW Touch2.KW Touch3.KW | length 2139.8
  Top Layer w15: v1(5139,5354) R12.2
  Top Layer w20: Touch3.KW 4374.5,5889.5 4472.5,5889.5 v1(4476,5893) ; v1@4466,4374 4474,4374 v1(4477,4371) ; 4663,4486 4736,4486 4780,4530 IC1.15 ; IC1.11 4950,4730 5056,4836 5056,5002.78 5067.72,5014.5 5130.3,5014.5 C4.2 ; IC1.2 5226.28,4530 5240,4543.72 5240,4656 5238,4658 ; 5238,4678 5240,4676 5240,4658 ; v1(5672,5828) 5677,5833 v1@5689,5833 ; MCU1.40 5960.98,6744.67 6007.28,6744.67 6019,6756.39 6019,6780 6042,6803 6079,6803 6112,6836 6112,6931 ; v1@5984,5826 v1(5988.5,5821.5) ; v1@6114,5829 6115,5828 v1(6115,5820) ; 6307,7081 6307,7054.56 6318.72,7042.84 C2.1 6501.84,7042.84 6502,7043 6509.89,7035.11 6586.89,7035.11 CN1.1 ; 6418,5737 6431,5724 CN6.1 ; IC4.7 6444,6911 6466,6933 v1(6472,6933)
  Bottom Layer w20: v1@5721.5,5825.5 v1@5723,5824
  other v1: 5721.5,5828
  other v2: 4588,4149 4988,4149 5188,4149 5788,4149 5988,4149 6188,4149 6388,4149 6588,4149 5588,4349 5788,4349 6188,4349 6388,4349 4788,4949 5788,4949 6188,4949 5388,5149 5588,5149 4788,5549 6388,5749 4188,6549 4388,6549 6588,6949
H1_P1: CN5.2 MCU1.11 | length 3307.7
  Top Layer w15: v1(5352,7042.5) 5353.5,7044 5527.32,7044 5577.96,6993.36 5577.96,6938.39 MCU1.11
  Bottom Layer w20: v1(5352,7042.5) 5284.5,7042.5 5199,6957 5199,5812 5360,5651 5699,5651 5747,5603 5747,5354 5846,5255 6247,5255 6331,5339 CN5.2
H1_P2: CN5.3 MCU1.10 | length 2956.3
  Top Layer w15: v1(5600,6847) 5610.43,6857.43 MCU1.10
  Bottom Layer w20: v1(5600,6847) 5511,6847 5420,6938 5352,6938 5270,6856 5270,5873 5421,5722 5736,5722 5784,5674 5784,5377 5830,5331 6201,5331 6231,5361 CN5.3
ICPCK: CN1.4 MCU1.44 | length 967.6
  Top Layer w15: MCU1.44 5963.16,6872.84 6002.21,6872.84 6011,6881.63 6011,7126 6210,7325 CN1.4
ICPDA: CN1.3 MCU1.43 | length 919.1
  Top Layer w15: MCU1.43 6030,6839 6061,6870 6061,7080 6206,7225 CN1.3
IN_L: IC1.7
INT0: CN5.1 MCU1.3 | length 3105.2
  Top Layer w15: MCU1.3 5830.9,7031.43 5863,7063.53 v1(5863,7117)
  Bottom Layer w20: v1(5863,7117) 5780,7117 5758,7139 5758,7299 5829,7370 6151,7370 6192,7329 6192,6841 6288.5,6744.5 6471.5,6744.5 6504,6712 6504,5491 6479,5466 CN5.1
LCD_CS: MCU1.4 R3.2 | length 1767.9
  Top Layer w12: MCU1.4 5799.4,7105.4 5815,7121 v1(5815,7176) ; R3.2 6125.5,6181.7 6125.5,6227.5 v1@6126,6228
  Bottom Layer w20: v1(5815,7176) 5818,7179 5818,7268 5867,7317 6075,7317 6118,7274 6118,6259.29 6119.3,6257.98 6119.3,6239.7 v1(6126,6233)
LCD_RST: MCU1.41 R2.2 | length 1996.9
  Top Layer w12: v1(5600,6696) 5602,6698 5602,6739 5639.01,6776.01 MCU1.41 ; R2.2 6201,6182.2 6201,6231 v1@6202,6232
  Bottom Layer w20: v1(5600,6696) 5554,6650 5554,6111 5720.98,5944.02 6055.5,5944.02 6205.5,6094.02 6205.5,6229.5 v1(6202,6233)
LCD_SCL: MCU1.2 R5.2 | length 1380.8
  Top Layer w12: MCU1.2 5862.39,7014.39 5918,7070 5918,7176 v1(5916,7178) ; R5.2 5973,6183.2 5978,6188.2 v1(5978,6232)
  Bottom Layer w15: v1(5916,7178) 5978,7116 5978,6726 5910,6658 5910,6240.79 5918.79,6232 v1(5978,6232)
LCD_SDA: MCU1.39 R4.2 | length 1426.7
  Top Layer w12: R4.2 v1@6050,6232
  Top Layer w15: MCU1.39 6047.02,6713.02 v1(6072,6738)
  Bottom Layer w15: v1(6050,6233) 6043.3,6239.7 6043.3,6265.7 6007,6302 6007,6324 6007,6331.5 ccw(c5989.5,6331.5) 5989.5,6349 5966.44,6349 cw(c5966.44,6366.5) 5966.44,6384 6049.56,6384 ccw(c6049.56,6401.5) 6049.56,6419 5966.44,6419 cw(c5966.44,6436.5) 5966.44,6454 6049.56,6454 ccw(c6049.56,6471.5) 6049.56,6489 5966.44,6489 cw(c5966.44,6506.5) 5966.44,6524 6049.56,6524 ccw(c6049.56,6541.5) 6049.56,6559 5966.44,6559 cw(c5966.44,6576.5) 5966.44,6594 5989.5,6594 ccw(c5989.5,6611.5) 6007,6611.5 6007,6662.04 6007,6673 v1(6072,6738)
LED_1: MCU1.7 R6.2 | length 483.1
  Top Layer w15: R6.2 5425.01,7134.99 5459,7101 5684,7101 5704.91,7080.09 MCU1.7
LED_2: MCU1.6 R7.2 | length 404.4
  Top Layer w15: R7.2 5545,7166.81 5545,7140 5554,7131 5703,7131 5736.41,7097.59 MCU1.6
LED_3: MCU1.5 R8.2 | length 327
  Top Layer w15: R8.2 5728.2,7172.8 5767.91,7133.09 MCU1.5
MISO: Designator14.1 IC4.2 MCU1.36 | length 1205.6
  Top Layer w15: v1(5750,6686) 5817.47,6618.53 MCU1.36 6059.47,6618.53 6114,6564 6253,6564 6280,6591 v1(6280,6650) ; v1(6440,6403) 6442.35,6405.35 6442.35,6480.78 IC4.2
  Bottom Layer w15: v1(5750,6686) 5750,6676.53 5771,6655.53 Designator14.1 ; v1(6280,6650) 6406,6650 6440,6616 v1(6440,6403)
MOSI: Designator15.1 IC4.5 MCU1.38 | length 1211.1
  Top Layer w15: v1(5860,6701) 5869.47,6701 5888.95,6681.52 MCU1.38 6120.71,6681.52 6129.5,6690.31 6129.5,6716 6153,6739.5 6153,6899 6238,6984 6481.1,6984 6544,6921.1 IC4.5
  Bottom Layer w15: Designator15.1 5860,6614 v1(5860,6701) v1@5854,6695
mosi-sh: Designator14.2 Designator15.2 IC2.14 | length 1296.7
  Top Layer w15: IC2.14 5363,5933 5417,5879 5643,5879 5744,5980 v1(5744,6059)
  Bottom Layer w15: v1(5744,6059) 5793,6059 5854,6120 Designator15.2 Designator14.2
MR: IC2.10 MCU1.1 | length 1357.3
  Top Layer w15: IC2.10 5563,6132 5587,6156 5636,6156 5731,6251 v1(5732,6251) ; MCU1.1 5896.23,6939.77 5896.23,6989.23
  Bottom Layer w20: v1(5732,6251) 5677,6251 5602,6326 5602,6627 5616,6641 5646,6641 5693,6688 5693,6720.75 5723.76,6751.5 5795,6751.5 5883,6839.5 5883,6964 v1(5920,7001)
Net1_A: 1.A R30.2 | length 1102.7
  Top Layer w20: 1.A 4328,7193 4381,7140 4882,7140 4941,7081 4941,7008 5004.15,6944.85 5004.15,6907.85 5022,6890 R30.2
Net1_B: 1.B R31.2 | length 603.8
  Top Layer w20: 1.B 4996,7320 5057,7259 5057,7075 5077,7055 5112.8,7055 R31.2
Net1_C: 1.C R32.2 | length 910.4
  Top Layer w20: 1.C 4528,6801 4581,6854 4760,6854 4820,6794 4820,6625 4887,6558 R32.2
Net1_D: 1.D R33.2 | length 1166.8
  Top Layer w20: 1.D 4328,6883 4436,6991 4788,6991 4917,6862 4917,6755 4948,6724 R33.2
Net1_DOT: 1.DOT R37.2 | length 1068.3
  Top Layer w20: 1.DOT 4428,6877 4479,6928 4778,6928 4865,6841 4865,6695 4919,6641 R37.2
Net1_E: 1.E R34.2 | length 1310.1
  Top Layer w20: 1.E 4227.99,6972.99 4303,7048 4813,7048 4963,6898 4963,6829 4985,6807 R34.2
Net1_F: 1.F R35.2 | length 939.2
  Top Layer w20: 1.F 4428,7204.72 4439.72,7193 4915,7193 5008,7100 5008,7028 5063,6973 R35.2
Net1_G: 1.G R36.2 | length 688.6
  Top Layer w20: 1.G 4628,6547 4700,6475 R36.2
NetC4_1: C4.1 IC1.8 | length 134
  Top Layer w20: IC1.8 5129,4951.5 5137.5,4960 C4.1
NetC9_2: C9.2 IC5.7 XT1.2 | length 532.2
  Top Layer w12: XT1.2 5382.96,4987.04 5468.61,4901.39 5468.61,4840.42 5524.03,4785 IC5.7 5618.38,4784 5769.62,4784 C9.2
NetC10_2: C10.2 IC5.8 XT1.1 | length 529.6
  Top Layer w12: XT1.1@5568,5002 XT1.1 5568,4978.61 5544.97,4955.59 5544.97,4953.97 5522.48,4931.48 5502.99,4950.96 5480.36,4928.34 5499.85,4908.85 5495.61,4904.61 5495.61,4851.61 5512.21,4835 5766.28,4835 C10.2
NetIC2_1: IC2.1 R15.2 | length 227.6
  Top Layer w15: R15.2 5214,5613.43 5214,5783 5231,5800 IC2.1
NetIC2_2: IC2.2 R17.2 | length 199.1
  Top Layer w15: R17.2 5286.14,5704.14 5313,5731 IC2.2
NetIC2_3: IC2.3 R19.2 | length 189.4
  Top Layer w15: R19.2 5361.36,5613.64 5361.36,5798.36 IC2.3
NetIC2_4: IC2.4 R21.2 | length 196.4
  Top Layer w15: IC2.4 5413,5693 5433.29,5672.71 R21.2
NetIC2_5: IC2.5 R23.2 | length 206.2
  Top Layer w15: IC2.5 5463,5717 5506.86,5673.14 R23.2
NetIC2_6: IC2.6 R25.2 | length 234
  Top Layer w15: IC2.6 5513.02,5730.98 5533,5711 5559,5711 5580.43,5689.57 5580.43,5618.86 5577,5615.43 R25.2
NetIC2_7: IC2.7 R27.2 | length 247.4
  Top Layer w15: IC2.7 5567.51,5795.49 5567.51,5746.49 5596,5718 5633,5718 5654,5697 R27.2
NetIC2_15: IC2.15 R13.2 | length 594.9
  Top Layer w15: R13.2 5139,5897.91 5182.09,5941 5288,5941 5313,5966 IC2.15
NetIC3_5: IC3.5 R26.1 R27.1 | length 1276.9
  Top Layer w15: v1(4786,5355) 4830.56,5355 IC3.5 ; R26.1 v1(5654,5504.4) R27.1
  Bottom Layer w20: v1(4786,5355) 4787,5354 5037,5354 5065,5382 5065,5543 5119,5597 5621,5597 5654,5564 v1(5654,5504.4)
NetLCD1_2: LCD1.2 R2.1 | length 216.4
  Top Layer w12: LCD1.2 6162.87,6045.87 6200,6083 R2.1
NetLCD1_3: LCD1.3 R3.1 | length 207.8
  Top Layer w12: R3.1 6126.5,6119 6139,6106.5 6139,5918.24 LCD1.3
NetLCD1_5: LCD1.5 R4.1 | length 218.4
  Top Layer w12: R4.1 6050,6073 6092,6031 LCD1.5
NetLCD1_6: LCD1.6 R5.1 | length 263.1
  Top Layer w12: R5.1 5975,6066 6002,6039 6042,6039 6068.38,6012.62 LCD1.6
NetLCD1_11: LCD1.11 R1.2 | length 647.4
  Top Layer w15: LCD1.11 5950.27,5867.07 5949.5,5866.3 5949.5,5851.18 5935,5836.68 5935,5795 6013,5717 6233,5717 6312,5796 R1.2
NetLED1_K: LED1.K R6.1 | length 84.8
  Top Layer w15: R6.1 5426.01,7235.99 5426.01,7318.01 LED1.K
NetLED2_K: LED2.K R7.1 | length 84.4
  Top Layer w15: R7.1 5539.51,7235.5 5539.51,7318.5 LED2.K
NetLED3_K: LED3.K R8.1 | length 84
  Top Layer w15: R8.1 LED3.K
NetR9_1: R9.1 Touch1.AW Touch1.KR | length 2484.5
  Top Layer w20: Touch1.AW 4232.45,4379.55 4273,4339 4273,4251 4293.32,4230.68 Touch1.KR 4504.68,4230.68 4568,4294 4568,5002 4607,5041 4607,6059 4642,6094 R9.1
NetR10_1: R10.1 Touch2.AW Touch2.KR | length 1821.7
  Top Layer w20: Touch2.AW 4234.22,5132.78 4251,5116 4251,5009 4276.09,4983.91 Touch2.KR 4484.91,4983.91 4561,5060 4561,6108 4632,6179 R10.1
NetR11_1: R11.1 Touch3.AW Touch3.KR | length 1246.4
  Top Layer w20: Touch3.KR 4369.62,5738 4270,5738 4261,5747 4261,5868 4250.99,5878.01 4243,5886 Touch3.AW 4165,5900 4165,6155 4274,6264 R11.1
NetR12_1: R12.1 R13.1 R14.2 | length 320.1
  Top Layer w15: R12.1 v1(5139,5508) R13.1 ; v1(5212,5353) 5212.29,5353.29 5212.29,5396.51 R14.2
  Bottom Layer w20: v1(5139,5508) 5139,5460 5208,5391 5208,5357 v1(5212,5353)
NetR14_1: R14.1 R15.1 R16.2 | length 326.9
  Top Layer w15: R14.1 v1(5212.57,5508) R15.1 ; R16.2 5287.07,5395.87 5287.07,5351.93 v1(5288,5351)
  Bottom Layer w20: v1(5212.57,5508) 5211,5506.43 5211,5464 5253,5422 5281.3,5393.7 5281.3,5357.7 v1(5288,5351)
NetR16_1: R16.1 R17.1 R18.2 | length 278.2
  Top Layer w15: R16.1 v1(5286.14,5508) ; R18.2 5360.86,5395.65 5360.86,5355.14 v1(5362,5354)
  Bottom Layer w20: v1(5286.14,5508) 5292.84,5501.3 5292.84,5470.16 5362,5401 v1(5362,5354)
NetR18_1: R18.1 R19.1 R20.2 | length 324.7
  Top Layer w15: R18.1 v1(5359.71,5508) R19.1 ; R20.2 5433.64,5396.44 5433.64,5351.36 v1(5434,5351)
  Bottom Layer w20: v1(5359.71,5508) 5360.94,5506.77 5360.94,5472.06 5434,5399 v1(5434,5351)
NetR20_1: R20.1 R21.1 R22.2 | length 328.2
  Top Layer w15: R20.1 v1(5433.29,5508) R21.1 ; R22.2 5506.93,5396.72 5506.93,5349.07 v1(5507,5349)
  Bottom Layer w20: v1(5433.29,5508) 5435.23,5506.06 5435.23,5472.77 5507,5401 v1(5507,5349)
NetR22_1: R22.1 R23.1 R24.2 | length 326.5
  Top Layer w15: R22.1 v1(5506.86,5508) R23.1 ; R24.2 5580.71,5396.51 5580.71,5350.29 v1(5581,5350)
  Bottom Layer w20: v1(5506.86,5508) 5513.52,5501.34 5513.52,5468.48 5581,5401 v1(5581,5350)
NetR24_1: R24.1 R25.1 R26.2 | length 336.6
  Top Layer w15: R24.1 v1(5580.43,5508) R25.1 ; R26.2 5654.5,5396.3 5654.5,5346.5 v1(5655,5346)
  Bottom Layer w20: v1(5580.43,5508) 5580.43,5467.57 5657,5391 5657,5348 v1(5655,5346)
OE: IC2.13 MCU1.8 | length 1918.8
  Top Layer w15: IC2.13 5413,5972.82 5456.82,5929 v1(5528,5929) ; v1(5647,7049) 5653,7043 5660,7043 5673.42,7029.58 MCU1.8
  Bottom Layer w20: v1(5528,5929) 5528,6040 5475,6093 5475,6704 5520,6749 5671.76,6749 5713.76,6791 5785,6791 5820.5,6826.5 5820.5,6997.5 5769,7049 v1(5647,7049)
OUT_L+: IC1.1
OUT_L-: IC1.3
OUT_R+: CN4.1 IC1.14 | length 743
  Top Layer w20: CN4.1 4834,4020 4834,4386 4860.5,4412.5 4922.5,4412.5 4964,4454 4964,4552 4936,4580 IC1.14
OUT_R-: CN4.2 IC1.16 | length 542.6
  Top Layer w20: CN4.2 4734,4020 4734,4410 4804,4480 IC1.16
RX: CN5.4 MCU1.33 R29.2 | length 3277.7
  Top Layer w15: MCU1.33 5893.89,6364.11 5928,6330 6278,6330
  Top Layer w20: R29.2 5952,4610 6096,4754 6096,5153 6159,5216 6376.38,5216 6388.38,5204 v1(6396.5,5204) ; CN5.4 6131,5375 6179,5327 6457,5327 6538,5408 6538,6070 6278,6330
  Bottom Layer w15: v1(6392,5332) 6396.5,5327.5 v1(6396.5,5204)
SPI_CLK: IC2.11 IC4.6 MCU1.35 | length 2148.8
  Top Layer w15: IC2.11 5513,6019 5530,6002 5654,6002 5675,6023 5675,6132 5717,6174 v1(5748,6174) ; v1(5691,6602) 5779.76,6602 5794.72,6587.03 MCU1.35 6023.97,6587.03 6044.5,6566.5 6044.5,6495.79 6053.29,6487 6068,6487 6075.5,6487 6075.5,6506.69 6110.5,6506.69 6110.5,6467.31 6145.5,6467.31 6145.5,6506.69 6180.5,6506.69 6180.5,6487 6196,6487 6254,6487 6328,6561 6454,6561 6494,6601 IC4.6
  Bottom Layer w15: v1(5691,6602) 5691,6393 5801,6283 5801,6227 v1(5748,6174)
STCH: IC2.12 MCU1.9 | length 1299.1
  Top Layer w15: IC2.12 5463,5990 v1(5464,5989) ; MCU1.9 5641.92,6873.08 5671,6844 v1(5671,6841)
  Bottom Layer w20: v1(5464,5989) 5398,6055 5398,6731 5459,6792 5653.54,6792 5665.26,6803.72 5665.26,6835.26 v1(5671,6841)
SW_1: 2.2 MCU1.29 | length 1139.1
  Top Layer w15: 2.2 4970.06,6117.06 5053,6200 5604,6200 5767.91,6363.91 MCU1.29
TL_1: MCU1.28 R9.2 | length 1147.5
  Top Layer w15: R9.2 4853,6094 5011,6252 5603.28,6252 5736.41,6385.13 MCU1.28
TL_2: MCU1.27 R10.2 | length 1074.4
  Top Layer w15: R10.2 4885,6179 4988,6282 5590.85,6282 5704.91,6396.06 MCU1.27
TL_3: MCU1.26 R11.2 | length 1003.2
  Top Layer w15: R11.2 4813,6267.35 4825.19,6279.53 4912.76,6279.53 4945.23,6312 5578.43,6312 5673.42,6406.99 MCU1.26
Touch_1: MCU1.23 Touch1.T@4277.28,4024.85 | length 4095.4
  Top Layer w15: Touch1.T@4277.28,4024.85 4210.01,4024.85 4104.15,4024.85 3975,4154 3975,6149 4243,6417 5252,6417 5323.61,6488.61 MCU1.23
Touch_2: MCU1.24 Touch2.T@4414.37,5306.05 | length 2853.4
  Top Layer w15: 4351.41,5369 4085,5369 4005,5449 4005,6136.57 4255.43,6387 5568.57,6387 5610.43,6428.85 MCU1.24
Touch_3: MCU1.25 Touch3.T@4277.28,5531.3 | length 2579.5
  Top Layer w15: Touch3.T@4277.28,5531.3 4210.01,5531.3 4128.7,5531.3 4035,5625 4035,6124.15 4267.85,6357 5581,6357 5641.92,6417.92 MCU1.25
TX: CN5.5 MCU1.34 R28.2 | length 3157.7
  Top Layer w15: MCU1.34 5960.82,6419.72 5972.53,6408 6314,6408
  Top Layer w20: R28.2 5899,4686 6030.99,4817.99 6030.99,5271 ; CN5.5 6030.99,5271 ; 6314,6408 6622,6100 6622,5413 6480,5271 6030.99,5271
USB_N: CN3.2 IC5.6 | length 563.5
  Top Layer w12: CN3.2 5446.25,4299.25 5446.25,4655.43 5514.33,4723.51 5579.09,4723.51 5590.6,4735.02 IC5.6
USB_P: CN3.3 IC5.5 | length 518.7
  Top Layer w12: CN3.3 5473.25,4299.25 5473.25,4644.25 5525.51,4696.51 5579.09,4696.51 5590.6,4685 IC5.5
pads on no net: 1.DIS 2.3 2.4 CN3. CN3.4 IC1.9 IC1.12 IC2.9 IC3.1 IC5.4 IC5.9 IC5.10 IC5.11 IC5.12 IC5.13 IC5.14 IC5.15 LCD1.1 LCD1.12 Touch1.5 Touch1.T@4414.37,4552.82 Touch2.5 Touch2.T@4277.28,4778.07 Touch3.5 Touch3.T@4414.37,6059.27

## Polygon pours and split planes (outlines as drawn)
GND on Bottom Layer "GND_L02_P000" (solid, remove dead copper, pour order 0): 3937,7480.31 3937,3937 6693,3937 6692.91,3937.09 6692.91,7480
GND on Top Layer "GND_L01_P001" (solid, remove dead copper, pour order 1): 3937,7482 3937,3938.68 6693,3938.68 6692.91,3938.77 6692.91,7481.69

## Other copper
Top Layer:
  rectangle net +3.3: 4139,5619 4188,5763
  rectangle net GND: 5530,4253 5565,4396
  rectangle net +3.3: 6023,5864 6046,5933
  rectangle net +3.3: 6033,5772.64 6054,5894
  rectangle net GND: 5975,5817 6000,5935
  rectangle net GND: 5603,5765 5697,5837
  rectangle net GND: 6108,5811 6123,5930
  region net +3.3: 6310,5936 6310,6140.5 6239,6140.5 6239,5936
  region net +3.3: 6218,6594.5 6218,6708.75 6147,6708.75 6147,6594.5
  rectangle net +3.3: 6278.5,6745 6405,6890
  region net +3.3: 4223.5,4194 4063.5,4194 4063.5,4123 4223.5,4123
  region net +3.3: 4287.5,4943 4127.5,4943 4127.5,4872 4287.5,4872
  region net +3.3: 4289.5,5687 4129.5,5687 4129.5,5616 4289.5,5616
  region net +3.3: 6419.5,5125 6259.5,5125 6259.5,5054 6419.5,5054
  region net +5: 6515,4687.5 6515,4847.5 6444,4847.5 6444,4687.5
  region net +5: 4756,5793.5 4756,5953.5 4685,5953.5 4685,5793.5
  region net +5: 5101,5039.5 5101,5199.5 5030,5199.5 5030,5039.5
  rectangle net +5_JAC: 4917,4607 5059,4657
  rectangle net +5usb: 5364.5,4253 5422,4415
Bottom Layer:
  region net +3.3: 6310,5980.5 6310,6140.5 6239,6140.5 6239,5980.5
  region net +3.3: 6218,6594.5 6218,6754.5 6147,6754.5 6147,6594.5
  rectangle net +3.3: 6278.5,6819 6438.5,6890
  region net +3.3: 4223.5,4194 4063.5,4194 4063.5,4123 4223.5,4123
  region net +3.3: 4287.5,4943 4127.5,4943 4127.5,4872 4287.5,4872
  region net +3.3: 4289.5,5687 4129.5,5687 4129.5,5616 4289.5,5616
  region net +3.3: 6419.5,5125 6259.5,5125 6259.5,5054 6419.5,5054
  region net +5: 6515,4687.5 6515,4847.5 6444,4847.5 6444,4687.5
  region net +5: 4756,5793.5 4756,5953.5 4685,5953.5 4685,5793.5
  region net +5: 5101,5039.5 5101,5199.5 5030,5199.5 5030,5039.5
  rectangle net +5_JAC: 4908,4592 5063,4675

## Silkscreen, mask and mechanical layers (free items; w line width, h text height)
Mechanical 1:
  the board outline again, w10

## Text inside footprints (layer, text, board x,y; h text height)
Touch1: Top Overlay "W" at 4276.31,4479.93 h60 r90; Top Overlay "R" at 4179.95,4100.14 h60 r90
Touch2: Top Overlay "W" at 4276.31,5233.15 h60 r90; Top Overlay "R" at 4179.95,4853.37 h60 r90
Touch3: Top Overlay "W" at 4276.31,5986.37 h60 r90; Top Overlay "R" at 4179.95,5606.59 h60 r90